# Altium PCB LPCB221R0.PcbDoc (part 2 of 2)
Units mm, origin at the board's own origin, x right, y up, seen from the top; angles counter-clockwise.
Board outline 145 x 164.7 mm, 2 copper layers (Top Layer, Bottom Layer); 95 components, 92 nets, 422 pads, 91 vias.
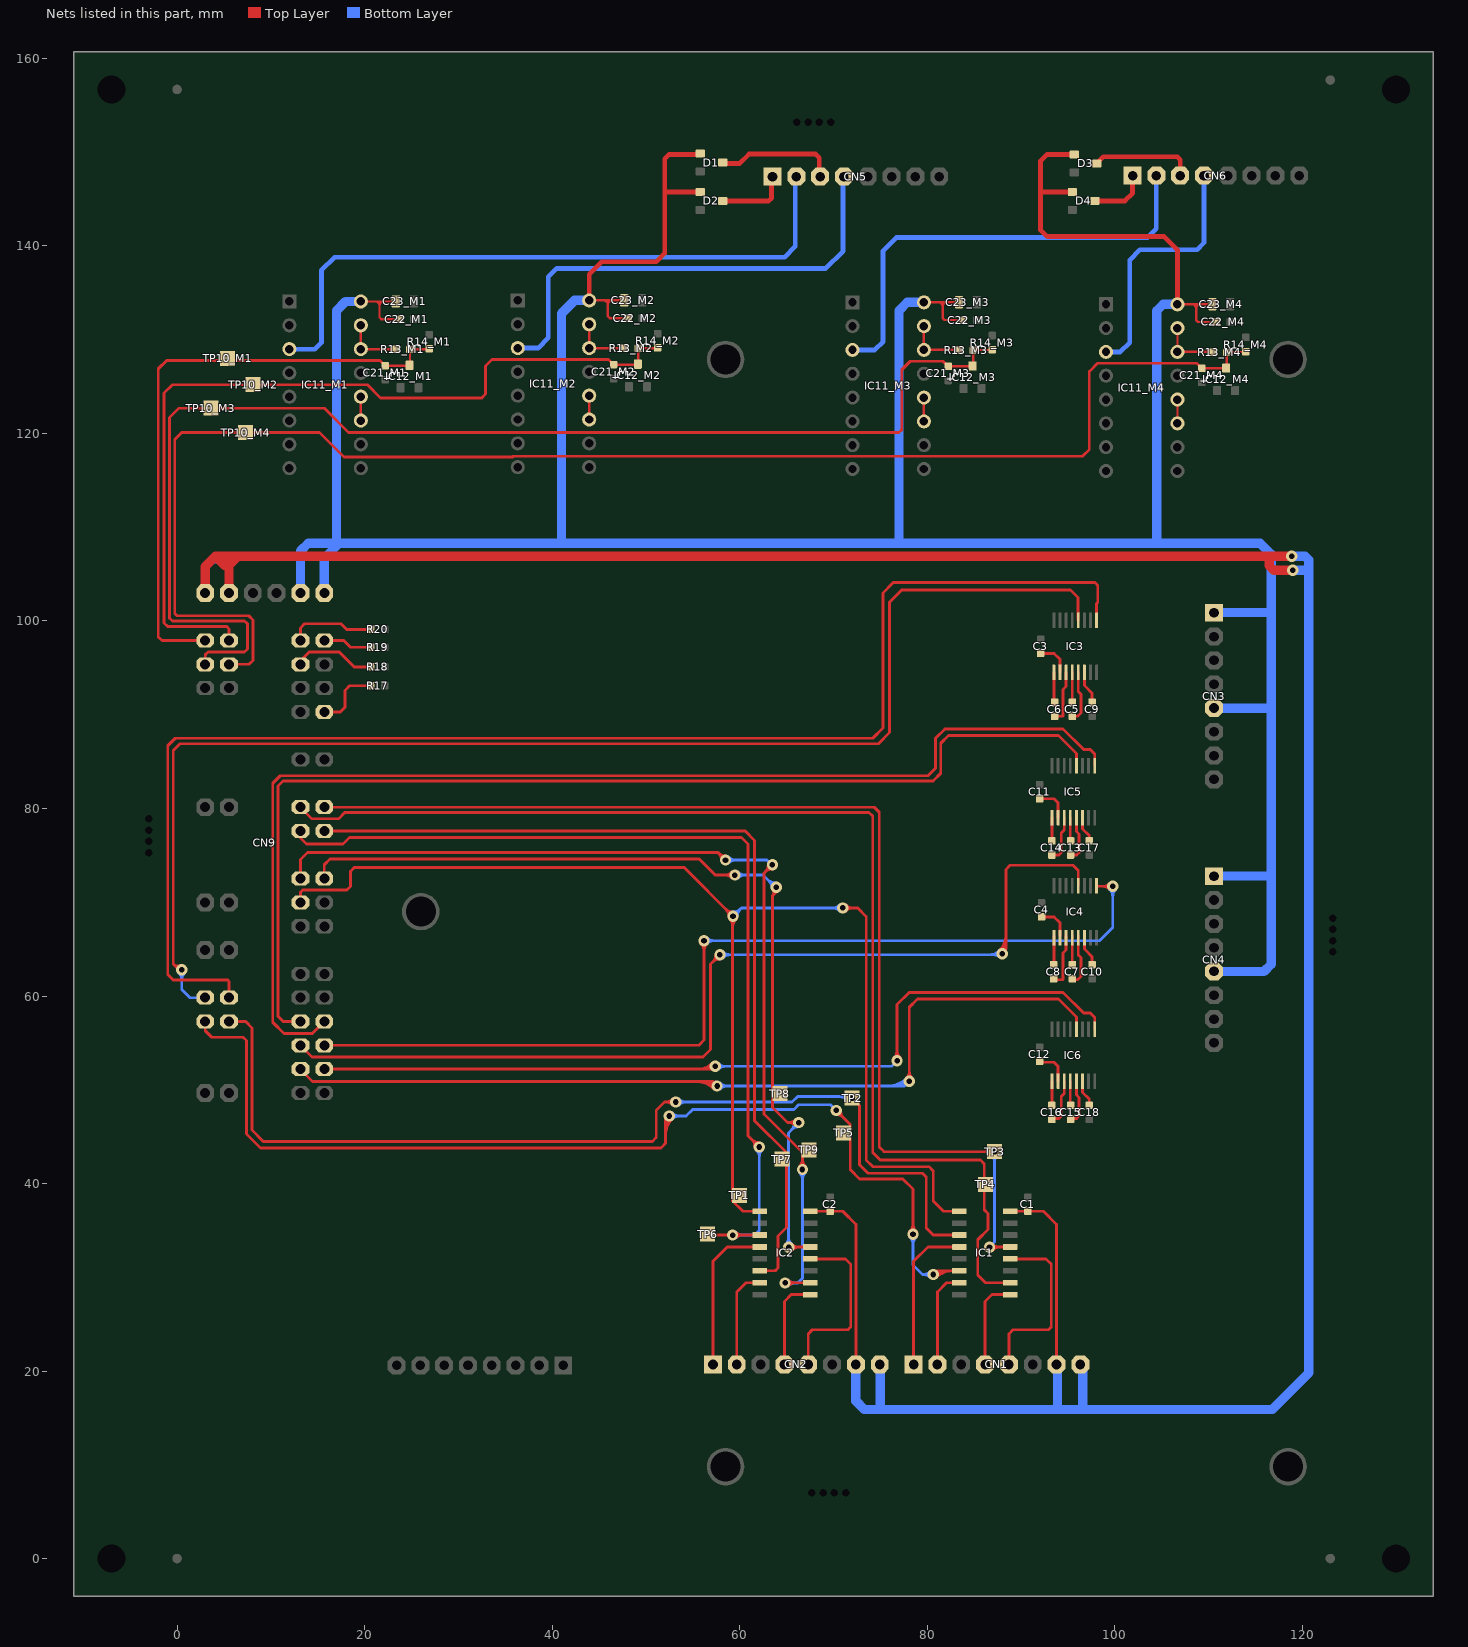
[diagram p2: the nets of this part, all layers, seen from the top]

## Via types
v1: diameter 1.2, hole 0.6, Top Layer to Bottom Layer, 91 vias

## Nets (pads, with @x,y where several pads share a name; then routed paths per layer and width w, separated by ;. In a path a pad name is that pad's centre, name@x,y a point inside that pad or via, vN(x,y) a via of type N, cw(c..) or ccw(c..) an arc to the next point about the centre after c; other vN are vias at no path point) (continued)
GIMBAL1_DIR: CN9.T33 IC1.3 TP2.1 | length 113.9
  Top Layer w0.3: CN9.T33@5.54,57.28 7.32,57.28 8,56.6 8,45.7 9.2,44.5 50.7,44.5 51.1,44.9 51.1,47.8 52,48.7 v1(53.2,48.7) ; v1@52.882,48.382 ccw(c52.114,47.614) 52.114,48.7 ccw(c52.114,49.786) v1@52.882,49.018 ; TP2.1@72,48.65 cw(c72,47.564) 72.768,48.332 cw(c73.536,49.1) TP2.1@72.45,49.1 ; v1(72,49.1) 72.8,48.3 72.8,42 73.7,41.1 79.5,41.1 79.9,40.7 79.9,35.25 80.65,34.5 80.655,34.505 IC1.3@83.45,34.505
  Bottom Layer w0.3: v1(53.2,48.7) 65.6,48.7 66.2,49.3 v1@72,49.3 ; v1@53.518,48.382 cw(c54.286,47.614) 54.286,48.7 cw(c54.286,49.786) v1@53.518,49.018 ; 70.431,49.3 cw(c70.431,47.531) v1@71.682,48.782 ; 71.155,49.3 cw(c71.155,48.255) v1@71.894,48.994 ; 71.396,49.3 ccw(c71.396,49.704) v1@71.682,49.418
GIMBAL1_STEP: CN9.T32 IC1.6 TP5.1 | length 127.7
  Top Layer w0.3: CN9.T32@3,57.28 3,56.3 3.7,55.6 7.046,55.6 7.4,55.246 7.4,45.3 8.9,43.8 51.6,43.8 52.1,44.3 52.1,46.9 52.4,47.2 v1(52.5,47.2) ; 52.1,45.148 cw(c54.552,45.148) v1@52.818,46.882 ; 52.1,45.872 cw(c53.828,45.872) v1@52.606,47.094 ; 52.1,46.596 cw(c53.104,46.596) v1@52.394,47.306 ; v1@70.3,47.35 cw(c70.3,46.264) 71.068,47.032 cw(c71.836,47.8) v1@70.75,47.8 ; v1(70.3,47.8) 71.8,46.3 71.8,41.5 72.8,40.5 77.4,40.5 78.5,39.4 v1(78.5,34.6) ; v1@78.182,34.918 ccw(c77.414,35.686) 78.5,35.686 ccw(c79.586,35.686) v1@78.818,34.918 ; v1@80.544,30.406 cw(c81.241,29.709) 81.241,30.695 ; v1(80.65,30.3) 81.045,30.695 IC1.6@83.45,30.695 ; v1@80.756,30.194 cw(c81.966,28.984) 81.966,30.695 ; v1@80.968,29.982 cw(c82.69,28.26) IC1.6@82.69,30.695
  Bottom Layer w0.3: v1(52.5,47.2) 54.3,47.2 55,47.9 65.8,47.9 66.3,48.4 69.7,48.4 v1(70.3,47.8) ; v1@52.818,46.882 cw(c53.586,46.114) 53.586,47.2 cw(c53.586,48.286) v1@52.818,47.518 ; v1@78.182,34.282 cw(c77.414,33.514) 78.5,33.514 cw(c79.586,33.514) v1@78.818,34.282 ; v1(78.5,34.6) 78.5,31.3 79.5,30.3 v1(80.65,30.3) ; v1@80.332,29.982 ccw(c79.564,29.214) 79.564,30.3 ccw(c79.564,31.386) v1@80.332,30.618
GIMBAL1_SW_EXT: CN9.T31 IC3.9 | length 151.7
  Top Layer w0.3: CN9.T31@5.54,59.82 5.54,61.56 5.4,61.7 -0.4,61.7 -1,62.3 -1,86.7 -0.2,87.5 74.2,87.5 75.3,88.6 75.3,103 76.39,104.09 97.9,104.09 98.2,103.79 98.2,101.99 98.075,101.865 IC3.9@98.075,100.065
GIMBAL1_SW_RET: CN9.T28 IC3.12 | length 146.8
  Top Layer w0.3: -0.06,63.06 ccw(c0.29,63.411) v1@0.451,62.942 ; -0.056,63.056 cw(c-0.312,62.8) v1@0.05,62.8 ; v1@0.354,63.226 cw(c0.117,63.917) -0.4,63.4 ; v1(0.5,62.8) 0.2,62.8 -0.4,63.4 ; IC3.12@96.125,100.065 96.096,100.094 96.096,102.494 95.3,103.29 77.29,103.29 76,102 76,88.1 74.8,86.9 0.3,86.9 -0.4,86.2 -0.4,63.4
  Bottom Layer w0.3: v1@0.182,62.482 cw(c-0.586,61.714) 0.5,61.714 cw(c1.586,61.714) v1@0.818,62.482 ; v1(0.5,62.8) 0.5,60.7 1.38,59.82 CN9.T28@3,59.82
GIMBAL2_DIR: CN9.T0 IC1.10 TP4.1 | length 126.6
  Top Layer w0.3: CN9.T0@13.16,80.14 14.4,78.9 17.2,78.9 17.886,79.586 73.814,79.586 74.2,79.2 74.2,43.3 75,42.5 85.7,42.5 86.1,42.1 86.1,37.2 86.496,36.804 86.496,35.967 86.5,35.963 86.5,35.1 85.4,34 85.4,30.25 86.225,29.425 IC1.10@88.85,29.425
GIMBAL2_STEP: CN9.T1 IC1.13 TP3.1 | length 125.4
  Top Layer w0.3: CN9.T1@15.7,80.14 74.36,80.14 74.9,79.6 74.9,43.9 75.4,43.4 v1(87.2,43.4) ; v1(86.65,33.2) 86.685,33.235 IC1.13@88.85,33.235 ; TP3.1@86.882,43.082 ccw(c86.114,42.314) 86.114,43.4 ccw(c86.114,44.486) TP3.1@86.882,43.718 ; v1@86.968,32.882 cw(c87.821,32.029) 87.821,33.235 ; v1@86.968,33.518 ccw(c87.652,34.202) 87.652,33.235
  Bottom Layer w0.3: v1(86.65,33.2) 87.2,33.75 v1(87.2,43.4) ; v1@86.882,43.082 cw(c86.114,42.314) 87.2,42.314 cw(c88.286,42.314) v1@87.518,43.082
GIMBAL2_SW_EXT: CN9.T21 IC5.9 | length 126.3
  Top Layer w0.3: CN9.T21@15.7,57.28 14.42,56 11.4,56 10.2,57.2 10.2,58.9 10.2,82.7 11,83.5 80.1,83.5 80.9,84.3 80.9,87.5 81.89,88.49 94.5,88.49 96.7,86.29 97.4,86.29 97.875,85.815 IC5.9@97.875,84.565
GIMBAL2_SW_RET: CN9.T20 IC5.12 | length 118.6
  Top Layer w0.3: CN9.T20@13.16,57.28 11.32,57.28 10.754,57.846 10.754,82.4 11.3,82.946 80.646,82.946 81.454,83.754 81.454,86.954 82.29,87.79 94,87.79 95.925,85.865 IC5.12@95.925,84.565
GIMBAL3_DIR: CN9.T2 IC2.3 TP6.1 | length 106.4
  Top Layer w0.3: CN9.T2@13.16,77.6 13.16,76.84 13.8,76.2 17.7,76.2 18.4,76.9 60.2,76.9 60.9,76.2 60.9,45.1 v1(62.1,43.9) ; TP6.1@56.6,34.6 56.7,34.5 v1(59.25,34.5) 59.255,34.505 IC2.3@62.05,34.505 ; v1@59.568,34.182 cw(c60.348,33.402) 60.348,34.505 ; v1@59.568,34.818 ccw(c60.324,35.574) 60.324,34.505 ; v1@61.65,43.9 ccw(c60.564,43.9) 61.332,44.668 ccw(c62.1,45.436) v1@62.1,44.35
  Bottom Layer w0.3: v1(59.25,34.5) 61.6,34.5 62.1,35 v1(62.1,43.9) ; v1@59.568,34.182 cw(c60.336,33.414) 60.336,34.5 cw(c60.336,35.586) v1@59.568,34.818 ; v1@61.782,43.582 cw(c61.014,42.814) 62.1,42.814 cw(c63.186,42.814) v1@62.418,43.582
GIMBAL3_STEP: CN9.T5 IC2.6 TP7.1 | length 95.8
  Top Layer w0.3: CN9.T5@15.7,77.6 60.6,77.6 61.6,76.6 61.6,46.7 65,43.3 65,35.3 64.1,34.4 64.1,31 63.795,30.695 IC2.6@62.15,30.695
GIMBAL3_SW_EXT: CN9.T23 IC4.9 | length 108.5
  Top Layer w0.3: CN9.T23@15.7,54.74 55.64,54.74 56.2,55.3 v1(56.2,65.9) ; v1@55.882,65.582 cw(c55.114,64.814) 56.2,64.814 cw(c57.286,64.814) v1@56.518,65.582 ; IC4.9@98.075,71.765 98.14,71.7 v1(99.8,71.7) ; v1@99.482,71.382 ccw(c98.714,70.614) 98.714,71.7 ccw(c98.714,72.786) v1@99.482,72.018
  Bottom Layer w0.3: v1(56.2,65.9) 98.4,65.9 99.8,67.3 v1(99.8,71.7) ; v1@56.518,65.582 cw(c57.286,64.814) 57.286,65.9 cw(c57.286,66.986) v1@56.518,66.218 ; v1@99.482,71.382 cw(c98.714,70.614) 99.8,70.614 cw(c100.886,70.614) v1@100.118,71.382
GIMBAL3_SW_RET: CN9.T22 IC4.12 | length 114.5
  Top Layer w0.3: CN9.T22@13.16,54.74 14.4,53.5 56.1,53.5 56.9,54.3 56.9,63.4 v1(57.9,64.4) ; v1@57.45,64.4 cw(c56.364,64.4) 57.132,63.632 cw(c57.9,62.864) v1@57.9,63.95 ; v1@87.682,64.818 ccw(c85.948,66.552) 88.4,66.552 ; v1@87.894,64.606 ccw(c86.672,65.828) 88.4,65.828 ; v1@87.9,64.5 88.4,65 ; v1@88.106,64.394 ccw(c87.396,65.104) 88.4,65.104 ; v1@88.128,64.931 ccw(c88.207,65.193) 88.4,65 ; v1@88.375,64.749 cw(c88.541,64.859) 88.4,65 ; IC4.12@96.125,71.765 96.125,73.375 95.556,73.944 88.844,73.944 88.4,73.5 88.4,65
  Bottom Layer w0.3: v1(57.9,64.4) 87.9,64.4 v1(88,64.5) ; v1@58.218,64.082 cw(c58.986,63.314) 58.986,64.4 cw(c58.986,65.486) v1@58.218,64.718 ; 86.672,64.4 ccw(c86.672,65.828) v1@87.682,64.818 ; 87.155,64.4 cw(c87.155,63.655) v1@87.682,64.182 ; 87.396,64.4 ccw(c87.396,65.104) v1@87.894,64.606
GIMBAL4_DIR: CN9.T6 IC2.10 TP9.1 | length 116
  Top Layer w0.3: CN9.T6@13.16,72.52 13.16,74.56 13.9,75.3 57.7,75.3 v1(58.5,74.5) ; v1@58.05,74.5 ccw(c56.964,74.5) 57.732,75.268 ccw(c58.5,76.036) v1@58.5,74.95 ; v1@63.05,74 cw(c61.964,74) 62.732,73.232 cw(c63.5,72.464) v1@63.5,73.55 ; v1(63.5,74) 62.6,73.1 62.6,47.4 66.7,43.3 v1(66.7,41.5) ; v1(64.85,29.4) 64.875,29.425 IC2.10@67.45,29.425 ; v1@65.168,29.082 cw(c65.997,28.253) 65.997,29.425 ; v1@65.168,29.718 ccw(c65.876,30.426) 65.876,29.425 ; v1@66.382,41.818 ccw(c65.614,42.586) 66.7,42.586 ccw(c67.786,42.586) v1@67.018,41.818
  Bottom Layer w0.3: v1(58.5,74.5) 62.9,74.5 63.4,74 v1(63.5,74) ; v1@58.818,74.182 cw(c59.586,73.414) 59.586,74.5 cw(c59.586,75.586) v1@58.818,74.818 ; v1(64.85,29.4) 66.2,29.4 66.7,29.9 v1(66.7,41.5) ; v1@65.168,29.082 cw(c65.936,28.314) 65.936,29.4 cw(c65.936,30.486) v1@65.168,29.718 ; v1@66.382,41.182 cw(c65.614,40.414) 66.7,40.414 cw(c67.786,40.414) v1@67.018,41.182
GIMBAL4_STEP: CN9.T7 IC2.13 TP8.1 | length 107.5
  Top Layer w0.3: CN9.T7@15.7,72.52 15.7,74 16.3,74.6 55.7,74.6 57.4,72.9 v1(59.5,72.9) ; v1@59.182,72.582 ccw(c58.414,71.814) 58.414,72.9 ccw(c58.414,73.986) v1@59.182,73.218 ; v1@63.542,71.327 cw(c63.162,71.038) 63.5,70.7 ; 63.743,70.943 ccw(c63.438,71.248) v1@63.781,71.509 ; v1(63.9,71.6) 63.9,71.1 63.5,70.7 ; v1(65.25,33.2) 65.285,33.235 IC2.13@67.45,33.235 ; v1@65.568,32.882 cw(c66.421,32.029) 66.421,33.235 ; v1@65.568,33.518 ccw(c66.252,34.202) 66.252,33.235 ; v1@65.982,46.182 ccw(c65.214,45.414) 65.214,46.5 ccw(c65.214,47.586) v1@65.982,46.818 ; v1(66.3,46.5) 65.1,46.5 63.5,48.1 63.5,70.7
  Bottom Layer w0.3: v1(59.5,72.9) 62.5,72.9 63.8,71.6 v1(63.9,71.6) ; v1@59.818,72.582 cw(c60.586,71.814) 60.586,72.9 cw(c60.586,73.986) v1@59.818,73.218 ; 62.961,72.439 ccw(c63.9,73.378) v1@63.9,72.05 ; 63.203,72.197 cw(c62.605,71.6) v1@63.45,71.6 ; v1@64.932,33.518 ccw(c64.284,34.166) 65.2,34.166 ; 65.2,34.407 ccw(c66.457,34.407) v1@65.568,33.518 ; v1(65.25,33.2) 65.2,33.25 65.2,45.4 v1(66.3,46.5) ; v1@65.85,46.5 cw(c64.764,46.5) 65.532,45.732 cw(c66.3,44.964) v1@66.3,46.05
GIMBAL4_SW_EXT: CN9.T25 IC6.9 | length 97.6
  Top Layer w0.3: CN9.T25@15.7,52.2 57.1,52.2 v1(57.4,52.5) ; 55.589,52.2 ccw(c55.589,54.311) v1@57.082,52.818 ; 56.314,52.2 ccw(c56.314,53.586) v1@57.294,52.606 ; v1@76.482,53.418 ccw(c75.714,54.186) 76.8,54.186 ccw(c77.886,54.186) v1@77.118,53.418 ; v1(76.8,53.1) 76.8,59.1 78.09,60.39 94.5,60.39 96.7,58.19 97.4,58.19 97.875,57.715 IC6.9@97.875,56.465
  Bottom Layer w0.3: v1(57.4,52.5) 76.2,52.5 v1(76.8,53.1) ; v1@57.718,52.182 cw(c58.486,51.414) 58.486,52.5 cw(c58.486,53.586) v1@57.718,52.818
GIMBAL4_SW_RET: CN9.T24 IC6.12 | length 108
  Top Layer w0.3: CN9.T24@13.16,52.2 14.46,50.9 57.1,50.9 ; 55.307,50.9 cw(c55.307,48.107) v1@57.282,50.082 ; 56.031,50.9 cw(c56.031,48.831) v1@57.494,50.294 ; 56.755,50.9 cw(c56.755,49.555) v1@57.706,50.506 ; v1@57.177,50.554 ccw(c56.866,50.666) 57.1,50.9 ; v1@57.446,50.823 cw(c57.334,51.134) 57.1,50.9 ; v1(57.6,50.4) 57.1,50.9 ; v1@77.782,51.218 ccw(c77.014,51.986) 78.1,51.986 ccw(c79.186,51.986) v1@78.418,51.218 ; v1(78.1,50.9) 78.1,58.8 78.99,59.69 94,59.69 95.925,57.765 IC6.12@95.925,56.465
  Bottom Layer w0.3: v1(57.6,50.4) 77.6,50.4 v1(78.1,50.9) ; v1@57.918,50.082 cw(c58.686,49.314) 58.686,50.4 cw(c58.686,51.486) v1@57.918,50.718 ; 75.807,50.4 ccw(c75.807,53.193) v1@77.782,51.218 ; 76.531,50.4 ccw(c76.531,52.469) v1@77.994,51.006 ; 77.255,50.4 ccw(c77.255,51.745) v1@78.206,50.794
GIMBAL_STEP_ENA: CN9.T8 IC1.1 IC2.1 TP1.1 | length 148.6
  Top Layer w0.3: CN9.T8@13.16,69.98 13.16,71.06 13.4,71.3 18.1,71.3 18.5,71.7 18.5,73.3 18.9,73.7 54.1,73.7 59.25,68.55 59.25,38.15 60.355,37.045 IC2.1@62.05,37.045 ; v1@58.85,68.5 ccw(c57.764,68.5) 58.532,69.268 ccw(c59.3,70.036) v1@59.3,68.95 ; v1@58.982,68.182 cw(c58.334,67.534) 59.25,67.534 ; 59.25,67.293 cw(c60.507,67.293) v1@59.618,68.182 ; v1(71,69.4) 72.6,69.4 73.5,68.5 73.5,42.5 74.2,41.8 80.2,41.8 80.65,41.35 80.65,38.15 81.755,37.045 IC1.1@83.45,37.045 ; v1@71.318,69.082 cw(c72.086,68.314) 72.086,69.4 cw(c72.086,70.486) v1@71.318,69.718
  Bottom Layer w0.3: v1(59.3,68.5) 60.2,69.4 v1(71,69.4) ; v1@59.3,68.95 ccw(c59.3,70.036) 60.068,69.268 ccw(c60.836,68.5) v1@59.75,68.5 ; v1@70.682,69.082 ccw(c69.914,68.314) 69.914,69.4 ccw(c69.914,70.486) v1@70.682,69.718
MA420IN1: CN5.2 IC11_M1.3 | length 70.7
  Bottom Layer w0.5: IC11_M1.3@11.98,129 14.7,129 15.4,129.7 15.4,137.4 16.8,138.8 64.8,138.8 65.95,139.95 CN5.2@65.95,147.6
MA420IN2: CN5.4 IC11_M2.3 | length 50.9
  Bottom Layer w0.5: IC11_M2.3@36.34,129.11 38.51,129.11 39.6,130.2 39.6,136.7 40.5,137.6 69.2,137.6 71.03,139.43 CN5.4@71.03,147.6
MA420IN3: CN6.2 IC11_M3.3 | length 49
  Bottom Layer w0.5: IC11_M3.3@72.04,128.91 74.41,128.91 75.3,129.8 75.3,139.5 76.7,140.9 103.5,140.9 104.45,141.85 CN6.2@104.45,147.4
MA420IN4: CN6.4 IC11_M4.3 | length 27.5
  Bottom Layer w0.5: IC11_M4.3@99.08,128.7 100.6,128.7 101.6,129.7 101.6,138.5 102.7,139.6 108.8,139.6 109.53,140.33 CN6.4@109.53,147.4
MLP_OUT1: C21_M1.1 CN9.A10 IC12_M1.3 R13_M1.1 R14_M1.2 TP10_M1.1 | length 65
  Top Layer w0.254: C21_M1.1@22.19,127.24 24.74,127.24 IC12_M1.3@24.79,127.29 24.84,127.34 R13_M1.1@24.84,128.99 26.84,128.99 R14_M1.2@26.89,129.04
  Top Layer w0.3: CN9.A10@3,97.92 -1.62,97.92 -2,98.3 -2,126.9 -1.1,127.8 21.63,127.8 C21_M1.1@22.19,127.24
MLP_OUT2: C21_M2.1 CN9.A11 IC12_M2.3 R13_M2.1 R14_M2.2 TP10_M2.1 | length 91.9
  Top Layer w0.254: C21_M2.1@46.55,127.35 49.1,127.35 IC12_M2.3@49.15,127.4 49.2,127.45 R13_M2.1@49.2,129.1 51.2,129.1 R14_M2.2@51.25,129.15
  Top Layer w0.3: CN9.A11@5.54,97.92 5.54,99.16 5.3,99.4 -1,99.4 -1.4,99.8 -1.4,124.3 -0.5,125.2 20.3,125.2 21.7,123.8 32.5,123.8 32.9,124.2 32.9,127.2 33.6,127.9 46,127.9 C21_M2.1@46.55,127.35
MLP_OUT3: C21_M3.1 CN9.A12 IC12_M3.3 R13_M3.1 R14_M3.2 TP10_M3.1 | length 136.5
  Top Layer w0.254: C21_M3.1@82.25,127.15 84.8,127.15 IC12_M3.3@84.85,127.2 84.9,127.25 R13_M3.1@84.9,128.9 86.9,128.9 R14_M3.2@86.95,128.95
  Top Layer w0.3: CN9.A12@3,95.38 3,96.4 3.3,96.7 7.2,96.7 7.5,97 7.5,99.7 7.2,100 -0.5,100 -0.8,100.3 -0.8,121.7 0.2,122.7 15.7,122.7 18.3,120.1 35.858,120.1 35.862,120.104 77.004,120.104 77.3,120.4 77.3,126.8 78.2,127.7 81.7,127.7 C21_M3.1@82.25,127.15
MLP_OUT4: C21_M4.1 CN9.A13 IC12_M4.3 R13_M4.1 R14_M4.2 TP10_M4.1 | length 160.8
  Top Layer w0.254: C21_M4.1@109.29,126.94 111.84,126.94 IC12_M4.3@111.89,126.99 111.94,127.04 R13_M4.1@111.94,128.69 113.94,128.69 R14_M4.2@113.99,128.74
  Top Layer w0.3: CN9.A13@5.54,95.38 7.68,95.38 8.1,95.8 8.1,100.1 7.646,100.554 0,100.554 -0.246,100.8 -0.246,119.354 0.5,120.1 15.2,120.1 17.8,117.5 35.798,117.5 35.862,117.564 96.564,117.564 97.3,118.3 97.3,126.6 98.2,127.5 108.73,127.5 C21_M4.1@109.29,126.94
NetC3_2: C3.2 IC3.2 | length 3.7
  Top Layer w0.3: C3.2@92.1,96.54 93.55,96.54 94.175,95.915 IC3.2@94.175,94.515
NetC4_2: C4.2 IC4.2 | length 3.7
  Top Layer w0.3: C4.2@92.1,68.44 93.55,68.44 94.175,67.815 IC4.2@94.175,66.415
NetC5_1: C5.1 IC3.4 | length 3.2
  Top Layer w0.3: IC3.4@95.475,94.515 95.475,91.365 C5.1@95.5,91.34
NetC5_2: C5.2 IC3.5 | length 5.5
  Top Layer w0.3: C5.2@95.5,89.84 96.05,89.84 96.4,90.19 96.4,92.19 96.125,92.465 IC3.5@96.125,94.515
NetC6_1: C6.1 IC3.1 | length 3.2
  Top Layer w0.3: IC3.1@93.525,94.515 93.525,91.415 C6.1@93.6,91.34
NetC6_2: C6.2 IC3.3 | length 5.7
  Top Layer w0.3: C6.2@93.6,89.84 94.45,89.84 94.5,89.89 94.5,92.69 94.825,93.015 IC3.3@94.825,94.515
NetC7_1: C7.1 IC4.4 | length 3.2
  Top Layer w0.3: IC4.4@95.475,66.415 95.475,63.265 C7.1@95.5,63.24
NetC7_2: C7.2 IC4.5 | length 5.5
  Top Layer w0.3: C7.2@95.5,61.74 96.05,61.74 96.4,62.09 96.4,64.09 96.125,64.365 IC4.5@96.125,66.415
NetC8_1: C8.1 IC4.1 | length 3.2
  Top Layer w0.3: IC4.1@93.525,66.415 93.525,63.315 C8.1@93.6,63.24
NetC8_2: C8.2 IC4.3 | length 5.7
  Top Layer w0.3: C8.2@93.6,61.74 94.45,61.74 94.5,61.79 94.5,64.59 94.825,64.915 IC4.3@94.825,66.415
NetC9_1: C9.1 IC3.6 | length 3.5
  Top Layer w0.3: IC3.6@96.775,94.515 96.775,93.115 97.6,92.29 C9.1@97.6,91.34
NetC10_1: C10.1 IC4.6 | length 3.5
  Top Layer w0.3: IC4.6@96.775,66.415 96.775,65.015 97.6,64.19 C10.1@97.6,63.24
NetC11_2: C11.2 IC5.2 | length 3.8
  Top Layer w0.3: C11.2@92,81.04 93.55,81.04 93.975,80.615 IC5.2@93.975,79.015
NetC12_2: C12.2 IC6.2 | length 3.8
  Top Layer w0.3: C12.2@92,52.94 93.55,52.94 93.975,52.515 IC6.2@93.975,50.915
NetC13_1: C13.1 IC5.4 | length 2.5
  Top Layer w0.3: IC5.4@95.275,79.015 95.275,76.565 C13.1@95.3,76.54
NetC13_2: C13.2 IC5.5 | length 4.8
  Top Layer w0.3: C13.2@95.3,75.04 95.95,75.04 96.2,75.29 96.2,77.29 95.925,77.565 IC5.5@95.925,79.015
NetC14_1: C14.1 IC5.1 | length 2.5
  Top Layer w0.3: C14.1@93.3,76.54 93.325,76.565 IC5.1@93.325,79.015
NetC14_2: C14.2 IC5.3 | length 5
  Top Layer w0.3: C14.2@93.3,75.04 94.05,75.04 94.3,75.29 94.3,77.39 94.625,77.715 IC5.3@94.625,79.015
NetC15_1: C15.1 IC6.4 | length 2.5
  Top Layer w0.3: IC6.4@95.275,50.915 95.275,48.465 C15.1@95.3,48.44
NetC15_2: C15.2 IC6.5 | length 4.8
  Top Layer w0.3: C15.2@95.3,46.94 95.95,46.94 96.2,47.19 96.2,49.19 95.925,49.465 IC6.5@95.925,50.915
NetC16_1: C16.1 IC6.1 | length 2.5
  Top Layer w0.3: C16.1@93.3,48.44 93.325,48.465 IC6.1@93.325,50.915
NetC16_2: C16.2 IC6.3 | length 5
  Top Layer w0.3: C16.2@93.3,46.94 94.05,46.94 94.3,47.19 94.3,49.29 94.625,49.615 IC6.3@94.625,50.915
NetC17_1: C17.1 IC5.6 | length 2.8
  Top Layer w0.3: IC5.6@96.575,79.015 96.575,77.815 97.3,77.09 C17.1@97.3,76.54
NetC18_1: C18.1 IC6.6 | length 2.8
  Top Layer w0.3: IC6.6@96.575,50.915 96.575,49.715 97.3,48.99 C18.1@97.3,48.44
NetCN5_1: CN5.1 D2.3 | length 7.7
  Top Layer w0.5: D2.3@58.3,144.8 63.1,144.8 63.41,145.11 CN5.1@63.41,147.6
NetCN5_3: CN5.3 D1.3 | length 12.6
  Top Layer w0.5: D1.3@58.3,148.8 60,148.8 61,149.8 68.1,149.8 68.49,149.41 CN5.3@68.49,147.6
NetCN6_1: CN6.1 D4.3 | length 6.1
  Top Layer w0.5: D4.3@97.9,144.8 101.1,144.8 101.91,145.61 CN6.1@101.91,147.4
NetCN6_3: CN6.3 D3.3 | length 11.1
  Top Layer w0.5: D3.3@98.1,148.8 98.8,149.5 106.7,149.5 106.99,149.21 CN6.3@106.99,147.4
NetCN9_ID1: CN9.ID1 R20.1 | length 9.3
  Top Layer w0.3: CN9.ID1@13.16,97.92 13.16,99.26 13.6,99.7 17.5,99.7 18.1,99.1 R20.1@20.65,99.1
NetCN9_ID2: CN9.ID2 R19.1 | length 5.2
  Top Layer w0.3: CN9.ID2@15.7,97.92 17.78,97.92 18.5,97.2 R19.1@20.65,97.2
NetCN9_ID3: CN9.ID3 R18.1 | length 8.9
  Top Layer w0.3: CN9.ID3@13.16,95.38 13.16,95.76 14.1,96.7 17.3,96.7 18.9,95.1 R18.1@20.65,95.1
NetCN9_ID4: CN9.ID4 R17.1 | length 7.2
  Top Layer w0.3: CN9.ID4@15.7,90.3 17.4,90.3 17.9,90.8 17.9,92.6 18.4,93.1 R17.1@20.65,93.1
NetIC11_M1_11: IC11_M1.11 IC11_M1.12 | length 2.5
  Top Layer w0.254: IC11_M1.11@19.6,121.38 IC11_M1.12@19.6,123.92
NetIC11_M1_14: IC11_M1.14 IC11_M1.15 R13_M1.2 | length 6.3
  Top Layer w0.254: IC11_M1.15@19.6,131.54 IC11_M1.14@19.6,129 23.33,129 R13_M1.2@23.34,128.99
NetIC11_M2_11: IC11_M2.11 IC11_M2.12 | length 2.5
  Top Layer w0.254: IC11_M2.11@43.96,121.49 IC11_M2.12@43.96,124.03
NetIC11_M2_14: IC11_M2.14 IC11_M2.15 R13_M2.2 | length 6.3
  Top Layer w0.254: IC11_M2.15@43.96,131.65 IC11_M2.14@43.96,129.11 47.69,129.11 R13_M2.2@47.7,129.1
NetIC11_M3_11: IC11_M3.11 IC11_M3.12 | length 2.5
  Top Layer w0.254: IC11_M3.11@79.66,121.29 IC11_M3.12@79.66,123.83
NetIC11_M3_14: IC11_M3.14 IC11_M3.15 R13_M3.2 | length 6.3
  Top Layer w0.254: IC11_M3.15@79.66,131.45 IC11_M3.14@79.66,128.91 83.39,128.91 R13_M3.2@83.4,128.9
NetIC11_M4_11: IC11_M4.11 IC11_M4.12 | length 2.5
  Top Layer w0.254: IC11_M4.11@106.7,121.08 IC11_M4.12@106.7,123.62
NetIC11_M4_14: IC11_M4.14 IC11_M4.15 R13_M4.2 | length 6.3
  Top Layer w0.254: IC11_M4.15@106.7,131.24 IC11_M4.14@106.7,128.7 110.43,128.7 R13_M4.2@110.44,128.69
P5VA: C1.1 C2.1 CN1.7 CN1.8 CN2.7 CN2.8 CN9.P5V1 CN9.P5V2 IC1.16 IC2.16 | length 338.8
  Top Layer w0.3: IC2.16@67.45,37.045 71.005,37.045 72.4,35.65 CN2.7@72.4,20.7 ; IC1.16@88.85,37.045 92.405,37.045 93.8,35.65 CN1.7@93.8,20.7
  Top Layer w1: CN9.P5V1@3,103 3,105.8 4.1,106.9 ; CN9.P5V2@5.54,103 5.54,105.94 ; v1(118.9,106.9) 116.5,106.9 ; v1(119,105.4) 117,105.4 116.5,105.9 116.5,106.9 ; 4.1,106.9 5.5,106.9 ; 4.1,106.9 5.06,105.94 5.54,105.94 ; 5.5,106.9 5.54,106.86 5.54,105.94 ; 5.5,106.9 6.5,106.9 ; 5.54,105.94 6.5,106.9 ; 6.5,106.9 116.5,106.9
  Bottom Layer w0.3: CN9.P5V1@3,103 3,105.9 3.4,106.3 5.2,106.3 5.54,105.96 CN9.P5V2@5.54,103
  Bottom Layer w1: CN2.7@72.4,20.7 72.4,16.8 73.3,15.9 75,15.9 ; CN2.8@74.94,20.7 75,20.64 75,15.9 ; CN1.7@93.8,20.7 93.9,20.6 93.9,15.9 ; CN1.8@96.34,20.7 96.6,20.44 96.6,15.9 ; v1(118.9,106.9) 120.3,106.9 120.7,106.5 120.7,105.4 ; v1(119,105.4) 120.7,105.4 ; 75,15.9 93.9,15.9 ; 93.9,15.9 96.6,15.9 ; 96.6,15.9 116.8,15.9 120.7,19.8 120.7,105.4
P24VA: C22_M1.1 C22_M2.1 C22_M3.1 C22_M4.1 C23_M1.1 C23_M2.1 C23_M3.1 C23_M4.1 CN3.1 CN3.5 CN4.1 CN4.5 CN9.P24V1 CN9.P24V2 D1.1 D2.1 D3.1 D4.1 IC11_M1.16 IC11_M2.16 IC11_M3.16 IC11_M4.16 | length 394.1
  Top Layer w0.254: IC11_M1.16@19.6,134.08 21.29,134.08 ; C23_M1.1@23.34,134.09 23.33,134.08 21.89,134.08 ; C22_M1.1@23.74,132.19 21.79,132.19 21.59,132.39 21.59,133.79 ; IC11_M2.16@43.96,134.19 45.65,134.19 ; C23_M2.1@47.7,134.2 47.69,134.19 46.25,134.19 ; C22_M2.1@48.1,132.3 46.15,132.3 45.95,132.5 45.95,133.9 ; IC11_M3.16@79.66,133.99 81.35,133.99 ; C23_M3.1@83.4,134 83.39,133.99 81.95,133.99 ; C22_M3.1@83.8,132.1 81.85,132.1 81.65,132.3 81.65,133.7 ; IC11_M4.16@106.7,133.78 108.39,133.78 ; C23_M4.1@110.44,133.79 110.43,133.78 108.99,133.78 ; C22_M4.1@110.84,131.89 108.89,131.89 108.69,132.09 108.69,133.49 ; 21.29,134.08 21.58,133.79 21.59,133.79 ; 21.29,134.08 21.59,134.08 ; 21.59,133.79 21.59,134.08 ; 21.59,133.79 21.6,133.79 21.89,134.08 ; 21.59,134.08 21.89,134.08 ; 45.65,134.19 45.95,134.19 ; 45.65,134.19 45.94,133.9 45.95,133.9 ; 45.95,133.9 45.95,134.19 ; 45.95,133.9 45.96,133.9 46.25,134.19 ; 45.95,134.19 46.25,134.19 ; 81.35,133.99 81.64,133.7 81.65,133.7 ; 81.35,133.99 81.65,133.99 ; 81.65,133.7 81.66,133.7 81.95,133.99 ; 81.65,133.7 81.65,133.99 ; 81.65,133.99 81.95,133.99 ; 108.39,133.78 108.68,133.49 108.69,133.49 ; 108.39,133.78 108.69,133.78 ; 108.69,133.49 108.7,133.49 108.99,133.78 ; 108.69,133.49 108.69,133.78 ; 108.69,133.78 108.99,133.78
  Top Layer w0.5: IC11_M2.16@43.96,134.19 43.96,136.96 45.3,138.3 51.1,138.3 52,139.2 52,145.7 ; D2.1@55.9,145.75 52.05,145.75 52,145.7 ; D1.1@55.9,149.75 52.45,149.75 52,149.3 52,145.7 ; D4.1@95.5,145.75 92.15,145.75 92.1,145.8 ; D3.1@95.6,149.75 92.75,149.75 92.1,149.1 92.1,145.8 ; IC11_M4.16@106.7,133.78 106.7,139.6 105.3,141 92.8,141 92.1,141.7 92.1,145.8
  Bottom Layer w1: CN9.P24V1@13.16,103 13.16,107.46 14,108.3 17.3,108.3 ; CN9.P24V2@15.7,103 15.7,106.7 17.3,108.3 ; 17,108.2 17,133.1 17.98,134.08 IC11_M1.16@19.6,134.08 ; 41,108.4 41,132.8 42.39,134.19 IC11_M2.16@43.96,134.19 ; 71.6,108.3 98.1,108.3 115.5,108.3 116.7,107.1 116.7,100.9 ; 71.8,108.3 17.3,108.3 ; 77,108.3 77,133.1 77.89,133.99 IC11_M3.16@79.66,133.99 ; 104.5,108.4 104.5,133.1 105.18,133.78 IC11_M4.16@106.7,133.78 ; CN4.5@110.6,62.62 115.92,62.62 116.7,63.4 116.7,72.8 ; CN4.1@110.6,72.78 110.62,72.8 116.7,72.8 ; CN3.5@110.6,90.72 110.62,90.7 116.7,90.7 ; CN3.1@110.6,100.88 110.62,100.9 116.7,100.9 ; 116.7,72.8 116.7,90.7 ; 116.7,90.7 116.7,100.9
STEP1_DIR: CN1.1 IC1.4 | length 16.5
  Top Layer w0.3: CN1.1@78.56,20.7 78.56,31.71 80.085,33.235 IC1.4@83.45,33.235
STEP1_STEP: CN1.2 IC1.7 | length 10.5
  Top Layer w0.3: CN1.2@81.1,20.7 81.1,28.45 82.075,29.425 IC1.7@83.45,29.425
STEP2_DIR: CN1.4 IC1.9 | length 9.7
  Top Layer w0.3: CN1.4@86.18,20.7 86.18,27.43 86.905,28.155 IC1.9@88.85,28.155
STEP2_STEP: CN1.5 IC1.12 | length 19.4
  Top Layer w0.3: CN1.5@88.72,20.7 88.72,23.97 89.15,24.4 92.95,24.4 93.246,24.696 93.246,31.4 92.681,31.965 IC1.12@88.85,31.965
STEP3_DIR: CN2.1 IC2.4 | length 16.5
  Top Layer w0.3: CN2.1@57.16,20.7 57.16,31.71 58.685,33.235 IC2.4@62.05,33.235
STEP3_STEP: CN2.2 IC2.7 | length 10.5
  Top Layer w0.3: CN2.2@59.7,20.7 59.7,28.45 60.675,29.425 IC2.7@62.05,29.425
STEP4_DIR: CN2.4 IC2.9 | length 9.7
  Top Layer w0.3: CN2.4@64.78,20.7 64.78,27.43 65.505,28.155 IC2.9@67.45,28.155
STEP4_STEP: CN2.5 IC2.12 | length 19.3
  Top Layer w0.3: CN2.5@67.32,20.7 67.32,23.97 67.75,24.4 71.55,24.4 71.846,24.696 71.846,31.4 71.281,31.965 IC2.12@67.55,31.965
pads on no net: CN9.A14 CN9.ID5 CN9.ID6 CN9.ID7 CN9.ID8 CN9.SCL CN9.SDA CN9.T14 CN9.T15 CN9.T16 CN9.T17 CN9.T26 CN9.T27 D1.2 D2.2 D3.2 D4.2 FID8_1.1 FID8_1_1.1 FID10_1.1 FID10_1_1.1 IC3.7 IC3.14 IC4.7 IC4.14 IC5.7 IC5.14 IC6.7 IC6.14 IC11_M1.1 IC11_M1.6 IC11_M1.7 IC11_M1.8 IC11_M1.9 IC11_M1.10 IC11_M2.1 IC11_M2.6 IC11_M2.7 IC11_M2.8 IC11_M2.9 IC11_M2.10 IC11_M3.1 IC11_M3.6 IC11_M3.7 IC11_M3.8 IC11_M3.9 IC11_M3.10 IC11_M4.1 IC11_M4.6 IC11_M4.7 IC11_M4.8 IC11_M4.9 IC11_M4.10 IC12_M1.2 IC12_M2.2 IC12_M3.2 IC12_M4.2 SN1.0 SN2.0 SN3.0 SN4.0 TOOLHOLE1_1.TOOL TOOLHOLE1_1_1.TOOL TOOLHOLE5_1.TOOL1 TOOLHOLE5_1_1.TOOL1

## Polygon pours and split planes (outlines as drawn)
AGND on Bottom Layer "Bottom Layer-No Net" (solid, remove dead copper, pour order 6): 123.252,153.348 123.252,110.6 -2.9,110.6 -3,110.5 -2.9,110.6 -2.9,153.7
DGND on Bottom Layer "Bottom Layer-No Net" (solid, remove dead copper, pour order 8): 123.252,7 123.252,110.648 123.1,110.8 -2.8,110.8 -3,110.6 -3,7
AGND on Top Layer "Bottom Layer-No Net" (solid, remove dead copper, pour order 5): 123.252,153.348 123.252,110.6 -2.9,110.6 -3,110.5 -2.9,110.6 -2.9,153.7
DGND on Top Layer "Bottom Layer-No Net" (solid, remove dead copper, pour order 7): 123.252,7 123.252,110.648 123.1,110.8 -2.8,110.8 -3,110.6 -3,7

## Keep-outs
Keep-Out Layer:
  lines w0.5: -3,7 123.252,7 123.252,153.348 8.252,153.348 8.252,151.348 cw(c-1,151.348) 7.652,148.07 7.652,137.848 cw(c0.5,137.848) 0.5,130.695 -3,130.695 -3,7

## Other copper
Top Layer:
  text "rLoop - Gimbal Node, Rev 1.0" at 5.2,-1.3 h3

## Silkscreen, mask and mechanical layers (free items; w line width, h text height)
Top Overlay:
  lines w0.1: 25.4,128.4 25.9,127.9 26.2,127.9
  lines w0.12: 112.7,128.1 113.182,127.618 113.666,127.618
  text "LINEAR POSITION 3-4" at 100.7,151.3 h2
  text "LINEAR POSITION 1-2" at 62.2,151.2 h2
  text "P24V" at 114.1,100.42 h1.5
  text "ID1" at 23.2,98.2 h1.5
  text "RETRACT 1" at 114.1,97.88 h1.5
  text "ID2" at 23.2,96.2 h1.5
  text "EXTEND 1" at 114.1,95.34 h1.5
  text "ID3" at 23.2,94.2 h1.5
  text "DGND" at 114.1,92.8 h1.5
  text "ID4" at 23.2,92.2 h1.5
  text "P24V" at 114.1,90.26 h1.5
  text "RETRACT 2" at 114.1,87.72 h1.5
  text "EXTEND 2" at 114.1,85.18 h1.5
  text "DGND" at 114.1,82.64 h1.5
  text "LIMIT SWITCH 3 - 4" at 106.7,81.84 h2 r90
  text "P24V" at 114.1,72.32 h1.5
  text "RETRACT 3" at 114.1,69.78 h1.5
  text "EXTEND 3" at 114.1,67.24 h1.5
  text "DGND" at 114.1,64.7 h1.5
  text "P24V" at 114.1,62.16 h1.5
  text "RETRACT 4" at 114.1,59.62 h1.5
  text "EXTEND 4" at 114.1,57.08 h1.5
  text "DGND" at 114.1,54.54 h1.5
  text "LIMIT SWITCH 3 - 4" at 106.7,53.74 h2 r90
  text "G210X 3 - 4" at 55.9,24.6 h2
  text "G210X 1 - 2" at 77.3,24.4 h2
  text "DIR3" at 56.7,17.2 h1.5 r270
  text "STP3" at 59.24,17.2 h1.5 r270
  text "DGND" at 61.78,17.2 h1.5 r270
  text "DIR4" at 64.32,17.2 h1.5 r270
  text "STP4" at 66.86,17.2 h1.5 r270
  text "DGND" at 69.4,17.2 h1.5 r270
  text "P5V" at 71.94,17.2 h1.5 r270
  text "P5V" at 74.48,17.2 h1.5 r270
  text "DIR1" at 78.1,17.2 h1.5 r270
  text "STP1" at 80.64,17.2 h1.5 r270
  text "DGND" at 83.18,17.2 h1.5 r270
  text "DIR2" at 85.72,17.2 h1.5 r270
  text "STP2" at 88.26,17.2 h1.5 r270
  text "DGND" at 90.8,17.2 h1.5 r270
  text "P5V" at 93.34,17.2 h1.5 r270
  text "P5V" at 95.88,17.2 h1.5 r270
  text "Gimbal Node" at 7.225,15.79 h2
  text "THERMAL INTERFACE" at 22.2,15.3 h2
  text "Rev. 1.0" at 7.125,13.99 h2
  text "S/N:" at 7.125,9.39 h2
Mechanical 1:
  lines w0.1: -11,-4 -11,160.695 134,160.695 134,-4 -11,-4
  lines w0.127: -3,7 -3,130.695 0.5,130.695 ccw(c0.5,137.848) 7.652,137.848 7.652,148.07 ccw(c-1,151.348) 8.252,151.348 8.252,153.348 123.252,153.348 123.252,7 -3,7
Mechanical 3:
  lines w2.4: -4.2,74.2 -4.2,5.8 66.4,5.8 ; -4.2,80.2 -4.2,131.8 ; -4.2,131.895 0.5,131.895 ; 0.5,131.896 ccw(c0.5,137.848) 6.452,137.848 6.452,148.27 ; 6.53,148.494 ccw(c-1.005,151.349) 7.052,151.349 7.052,154.548 64.552,154.548 ; 70.652,154.548 124.452,154.548 124.452,69.495 ; 72.4,5.8 124.452,5.8 124.452,63.495

## Text inside footprints (layer, text, board x,y; h text height)
LBL1: Top Overlay "rloop.org" at 3.6,9.95 h1 r90
LBL2: Top Overlay "STATIC SENSITIVE" at 99.526,10.104 h2